# Altium PCB HV Interlock Circuit.PcbDoc
Units mm, origin at the board's own origin, x right, y up, seen from the top; angles counter-clockwise.
Board outline 60 x 60 mm, 2 copper layers (Top Layer, Bottom Layer); 6 components, 12 nets, 31 pads, 0 vias.
Unrouted connection lines stored in the file: 5.
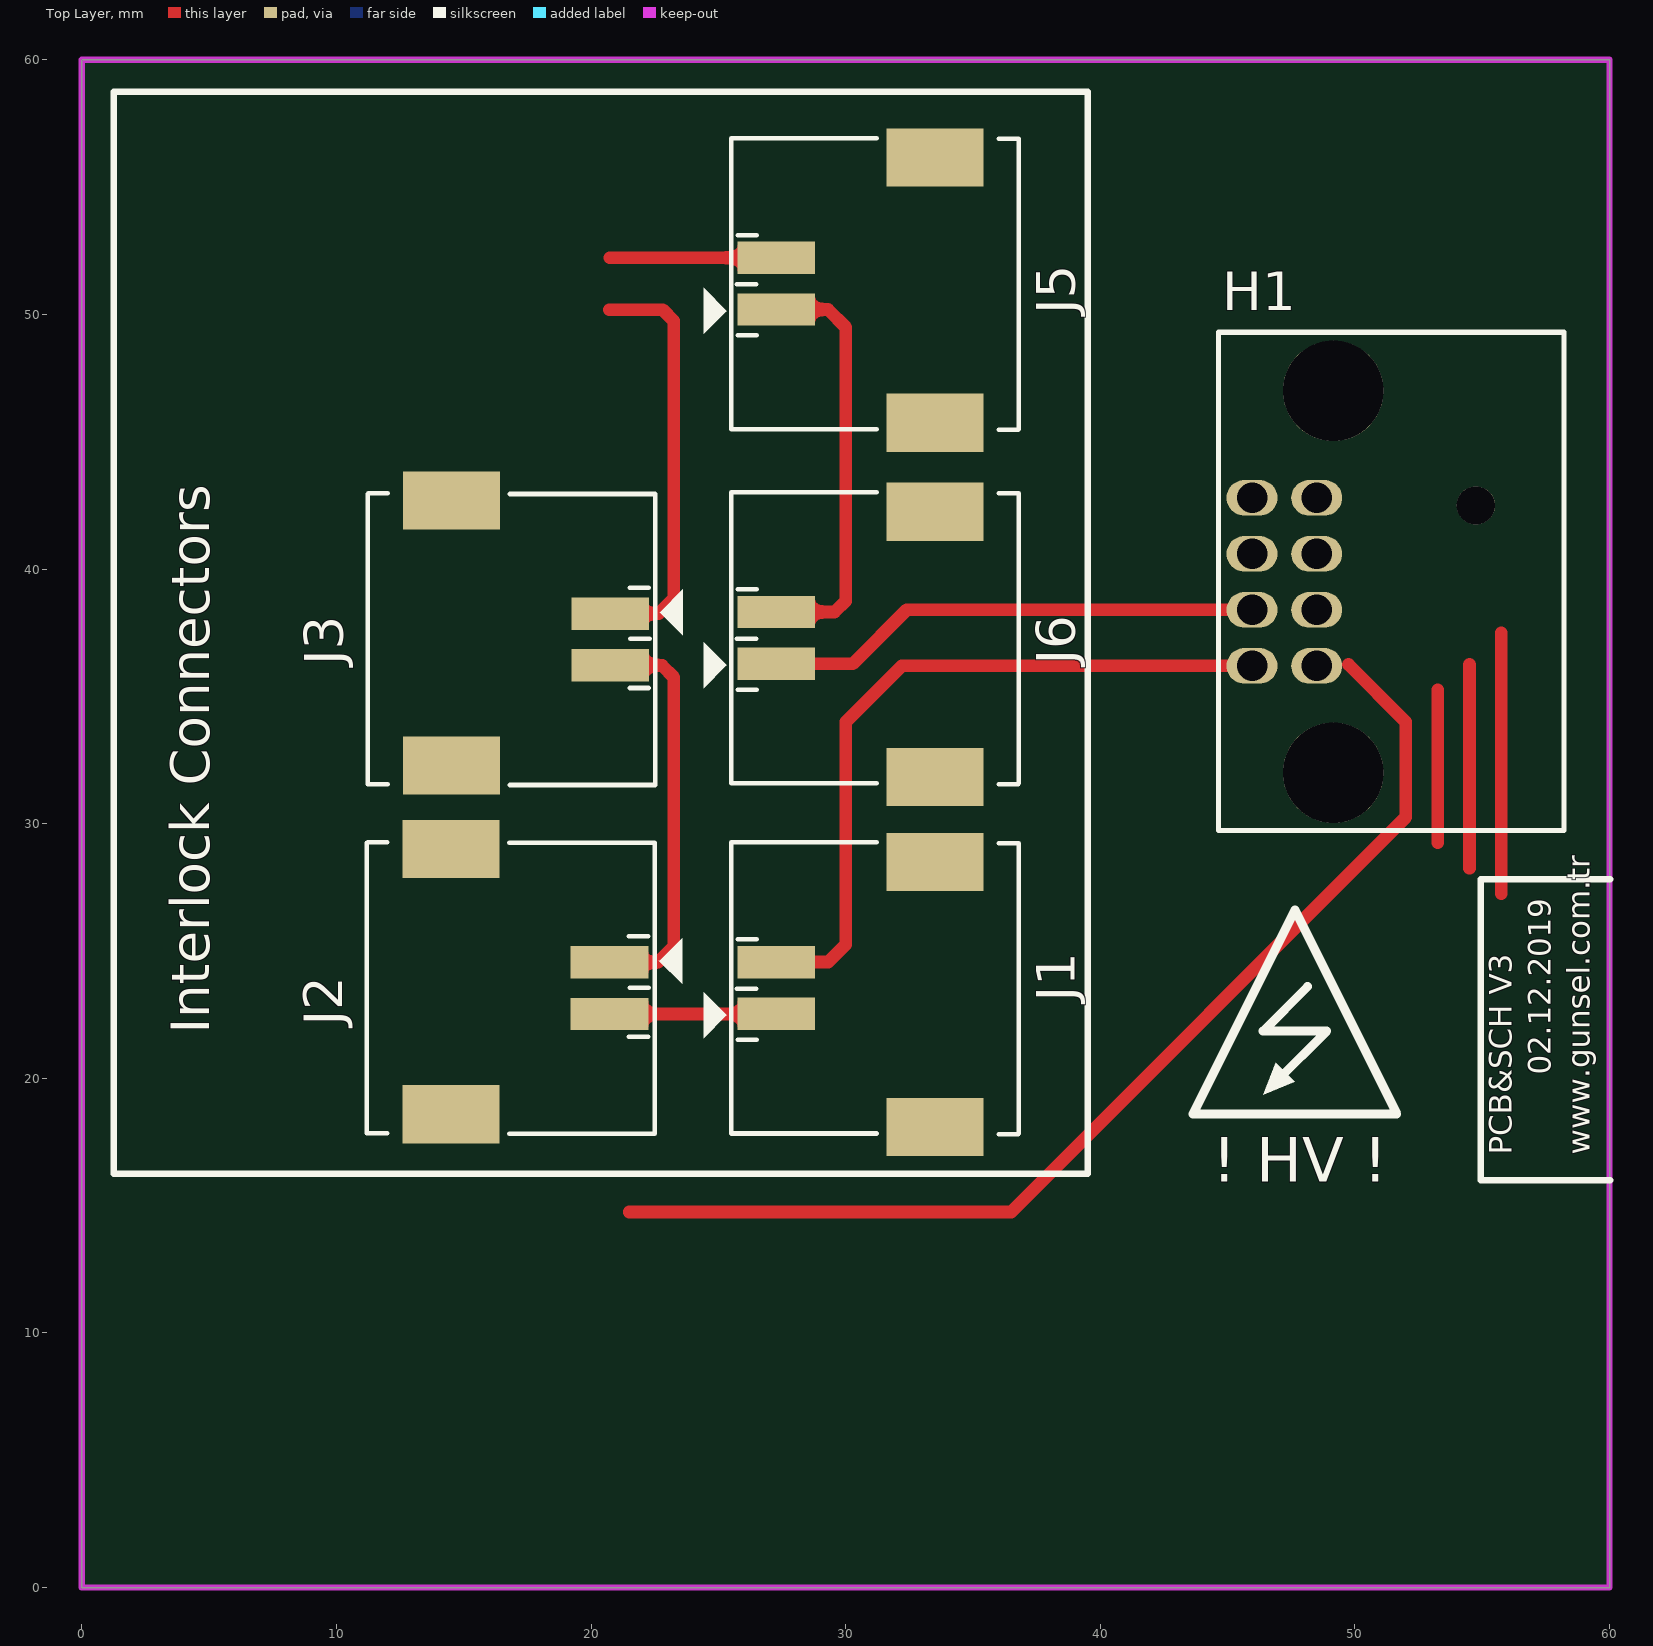
[diagram p0: Top Layer view]
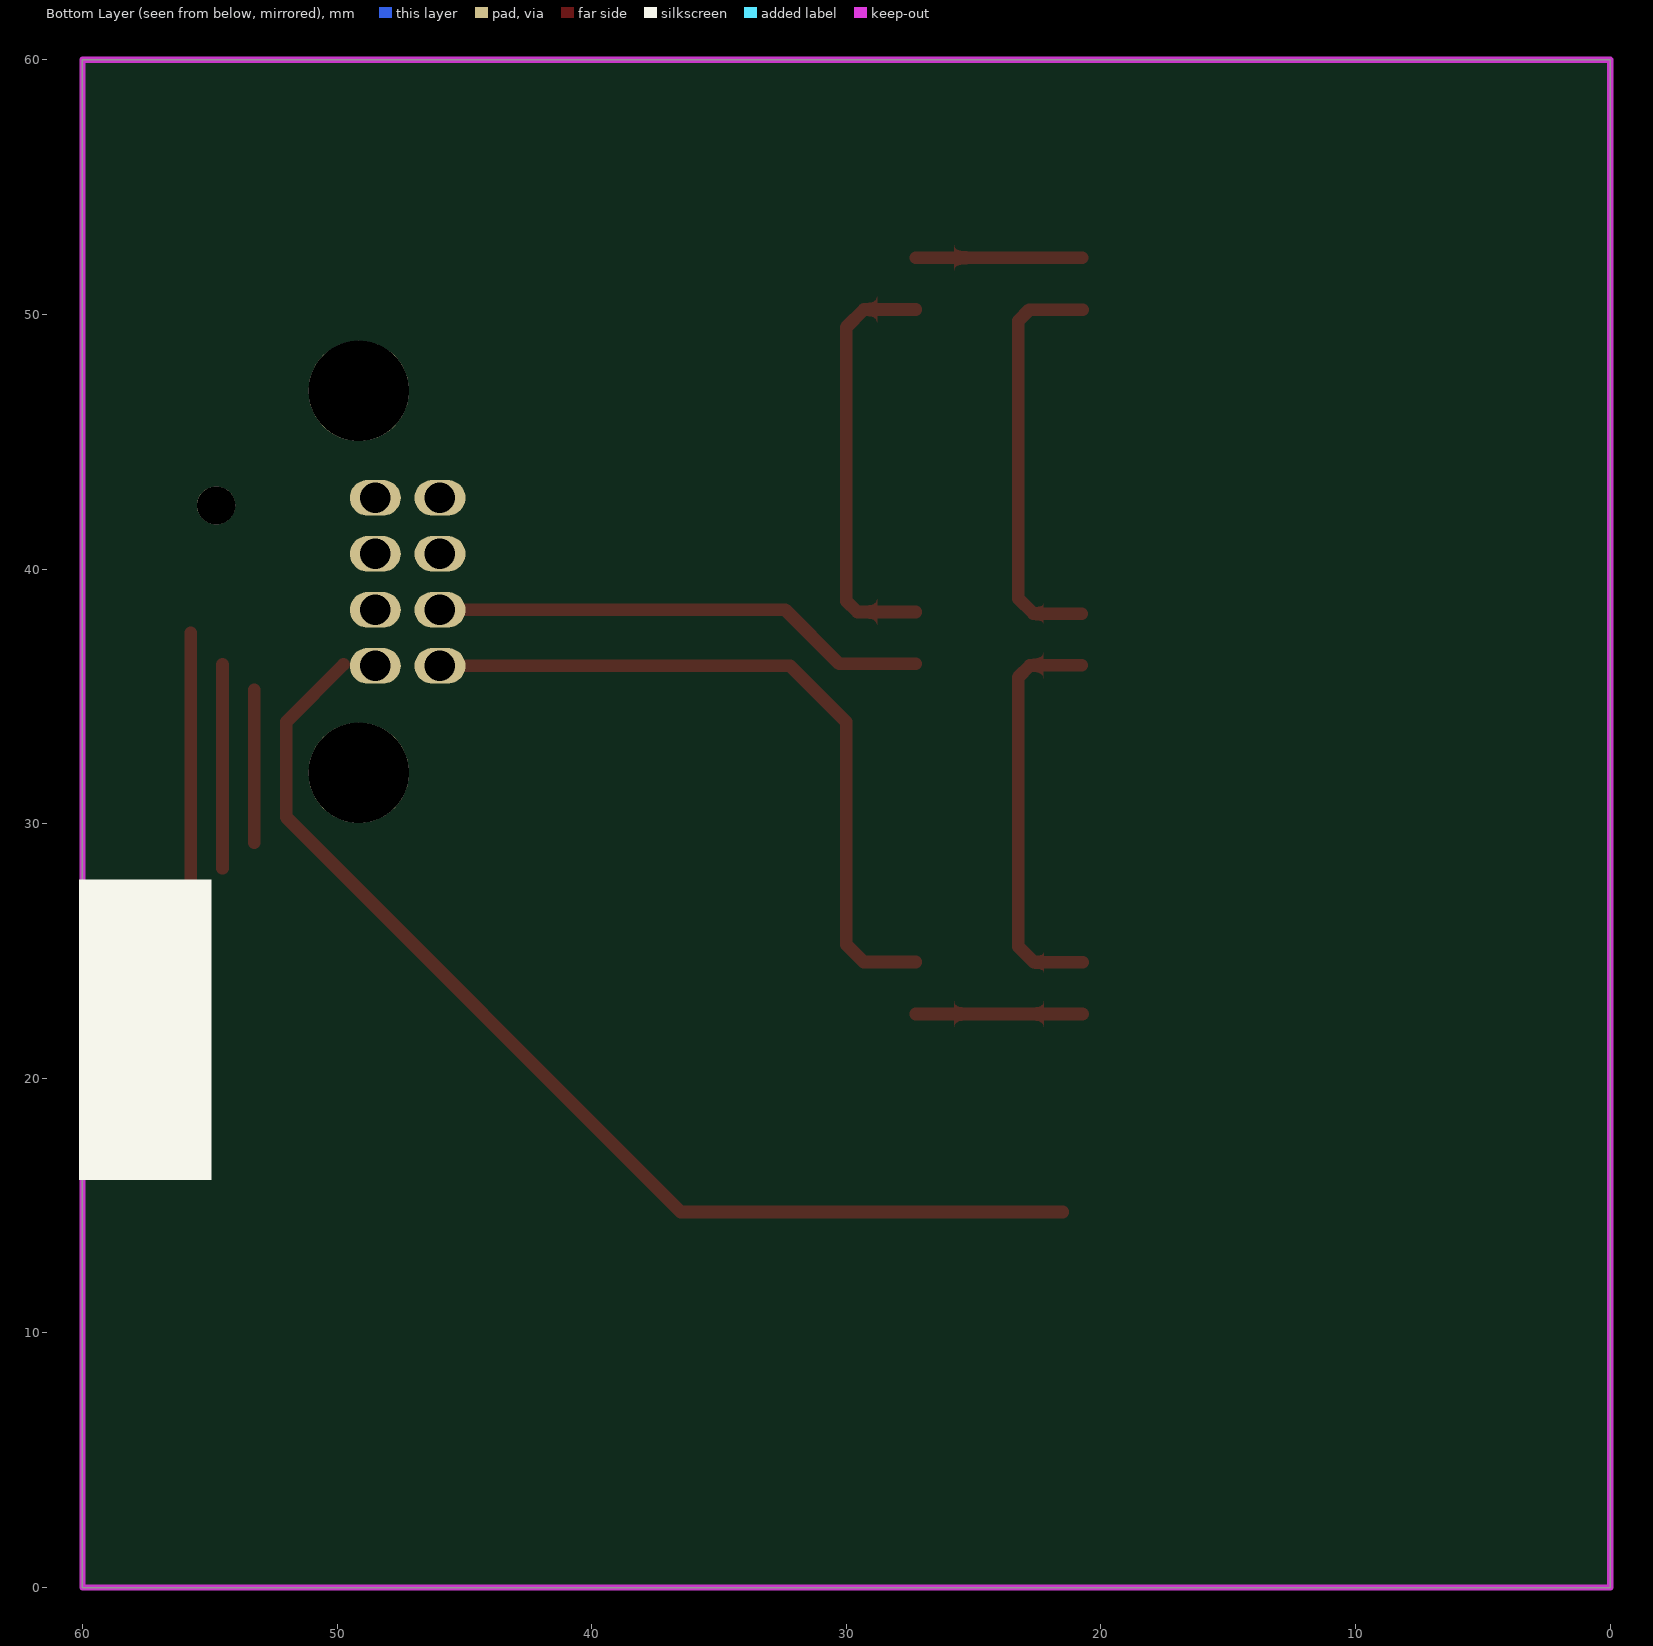
[diagram p1: Bottom Layer view, seen from below]
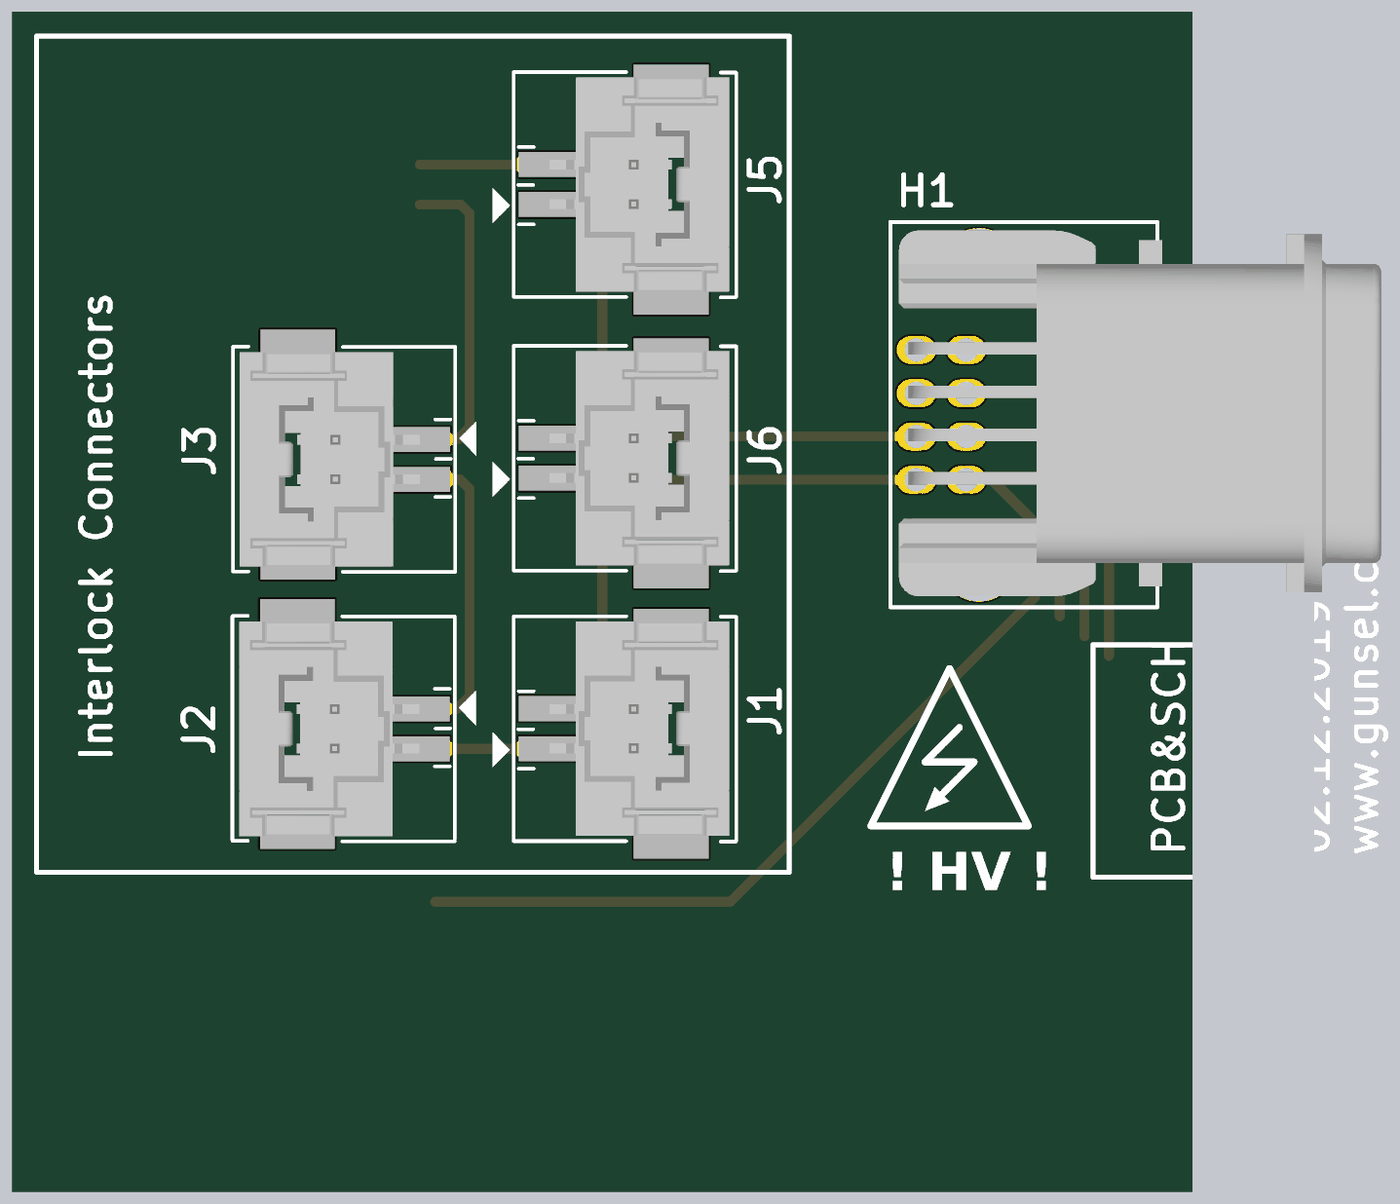
[diagram p2: 3D render of the assembled board from above, using the file's embedded part models]

## Layer stack, top to bottom
Top Solder: solder mask 0.0102, Solder Resist, Dk 3.5
Top Layer: signal copper 0.0356
Dielectric 1: dielectric 0.32, FR-4, Dk 4.8
Bottom Layer: signal copper 0.0356
Bottom Solder: solder mask 0.0102, Solder Resist, Dk 3.5

## Board outline
0,60 0,0 60,0 60,60

## Design rules (kind name [scope] priority, off if disabled: settings)
Clearance [All] p1: gap=0.254 ignorepadtopadclearanceinfootprint=FALSE except(0: Arc-Hole Track-Hole SMDPad-Hole THPad-Hole Via-Hole Fill-Hole Poly-Hole Region-Hole Text-Hole)
PolygonConnect [All] p1: connectstyle=Relief reliefconductorwidth=0.254 reliefentries=4 polygonreliefangle="90 Angle" airgapwidth=0.254
RoutingTopology RoutingTopology_1 [All] p1: topology=Shortest
RoutingTopology [All] p2: topology=Shortest
RoutingVias [All] p1: holewidth=0.711 width=1.27 viastyle="Through Hole" minholewidth=0.711 minwidth=1.27 maxholewidth=0.711 maxwidth=1.27
SolderMaskExpansion [All] p1: expansion=0.102
Width [All] p1: maxlimit=2 minlimit=0.254 preferedwidth=0.5 minimp=50.000000 maximp=50.000000 favimp=50.000000
29 further rules are at their usual default settings.

## Components (designator, comment, footprint, x,y, rotation, side; value= is the part's Value field where it differs from the comment)
H1 "TE-1379684-1" TE-1379684-1 45.96,36.2 r90 top
J1 "560020-0220" 560020-0220 27.277,22.531 r90 top
J2 "560020-0220" 560020-0220 20.723,24.555 r270 top
J3 "560020-0220" 560020-0220 20.75,38.25 r270 top
J5 "560020-0220" 560020-0220 27.277,50.195 r90 top
J6 "560020-0220" 560020-0220 27.277,36.281 r90 top

## Footprints (in the part's own frame and the unit in brackets; to place one, negate y for a bottom-side part, rotate by r counter-clockwise, add the part's x,y. Pads: shape width x height; smd on the part's side, far side on the other; paste and mask are expansions set on the pad)
560020-0220 [mil]
  rect 50x120 smd: 1(0,0) 2(80,0)
  rect 90x150 smd: ""(-175,-245) ""(235,-245)
  silkscreen extent -186,-375 265,112, body extent -175,-361 255,-1, height 311
TE-1379684-1 [mm]
  oval 1.4x2 hole 1.2: 1(6.6,0) 2(4.4,0) 3(2.2,0) 4(0,0) 5(6.6,-2.54) 6(4.4,-2.54) 7(2.2,-2.54) 8(0,-2.54)
  round 3.95 hole 3.95: Hole(-4.2,-3.19) Hole(10.8,-3.19)
  round 1.5 hole 1.5: Hole(6.3,-8.79)
  silkscreen extent -6.48,-12.25 13.1,1.33, body extent -5.92,-23.61 12.68,0.89, height 14.85

## Part data
J1 J2 J3 J5 J6: "CONN HEADER SMD 2POS 2MM", Color=Natural, Manufacturer=Molex, Supplier Part Number 1=WM10862DKR-ND, Connector Type="Male Pin", Contact Material="Copper Alloy", Contact Plating=Tin, Fastening Type=Latch, Gender=Male, Glow Wire Compliant=Non-compliant, Manufacturer Part Number=560020-0220, Mount="Surface Mount", Number of Circuits=2, Number of Contacts=2, Number of Positions=2, Number of Rows=1, Orientation=Vertical, Packaging="Tape and Reel", Pitch=0.079inch, Pricing 1="1=0.78, 10=0.685, 100=0.5912 (USD)", REACH SVHC=Unknown, Stock 1=20760, Supplier 1=Digi-Key, Termination=Solder
H1: ComponentLink1Description="TE-HEADER ASSY,8w .025 SERIES, R.", ComponentLink1URL=https://www.te.com/usa-en/product-1379684-1.html, ComponentLink2Description="Mouser-Automotive Connectors HEADER ASSY 8w .025 SERIES R. ANGLE", ComponentLink2URL=https://eu.mouser.com/ProductDetail/TE-Connectivity/1379684-1?qs=GQ3BsEl46pnfvp5%2F0fNBmw==

## Nets (pads, with @x,y where several pads share a name; then routed paths per layer and width w, separated by ;. In a path a pad name is that pad's centre, name@x,y a point inside that pad or via, vN(x,y) a via of type N, cw(c..) or ccw(c..) an arc to the next point about the centre after c; other vN are vias at no path point)
GND: H1.1 H1.2
NetH1_3: H1.3 J6.1 | length 19.6
  Top Layer w0.5: J6.1 30.281,36.281 32.4,38.4 H1.3
NetH1_4: H1.4 J1.2 | length 28.6
  Top Layer w0.5: J1.2 29.313,24.563 30,25.25 30,34 32.2,36.2 H1.4
NetH1_5: H1.5 | length 10.2
  Top Layer w0.5: 55.75,27.25 55.75,37.5
NetH1_6: H1.6 | length 8
  Top Layer w0.5: 54.5,28.25 54.5,36.25
NetH1_7: H1.7 | length 6
  Top Layer w0.5: 53.25,29.25 53.25,35.25
NetH1_8: H1.8 | length 43.9
  Top Layer w0.5: 21.5,14.75 36.5,14.75 52,30.25 52,34 49.75,36.25
NetJ1_1: J1.1 J2.2 | length 6.6
  Top Layer w0.5: J2.2 27.269,22.523 J1.1
NetJ2_1: J2.1 J3.2 | length 16.1
  Top Layer w0.5: J2.1 22.628,24.555 23.25,25.177 23.25,35.75 22.782,36.218 J3.2
NetJ3_1: J3.1 | length 16.4
  Top Layer w0.5: 20.723,50.187 22.813,50.187 23.25,49.75 23.25,38.845 22.655,38.25 J3.1
NetJ4_1: J5.2 | length 6.5
  Top Layer w0.5: 20.731,52.227 J5.2
NetJ5_1: J5.1 J6.2 | length 16.7
  Top Layer w0.5: J6.2 29.563,38.313 30,38.75 30,49.5 29.305,50.195 J5.1
pads on no net: H1.Hole J1. J2. J3. J5. J6.

## Polygon pours and split planes (outlines as drawn)
no net on Top Layer "Top Layer-No Net" (solid, pour order 18): 75.25,75.5
no net on Top Layer "Top Layer-No Net 1" (solid, pour order 14): 0,59.75

## Keep-outs
Keep-Out Layer:
  the board outline again, w0.254

## Other copper
Top Layer:
  pour cut-out: 36.773,15.75 51.486,30.463 51.486,33.486 51.5,33.5 56.5,33.5 56.5,27.329 45.25,16.079 45.25,15.75
  pour cut-out: 49.75,35.25 51.5,33.5 56.5,33.5 56.5,38 50.75,43.75 50,43.75
  pour cut-out: 31.75,39 44.75,39 44.75,35.75 31.75,35.75
  pour cut-out: 40.75,35.5
  pour cut-out: 44.25,29.5
  pour cut-out: 18.5,20.806 18.5,53.496 30.514,53.505 30.514,51.514 30.514,20.677

## Silkscreen, mask and mechanical layers (free items; w line width, h text height)
Top Overlay:
  region: 46.395,19.355 46.895,20.605 47.645,19.855
  lines w0.254: 60.025,16 54.938,16 54.938,27.811 60.025,27.811 ; 1.25,16.25 1.25,58.75 39.5,58.75 39.5,16.25 1.25,16.25
  lines w0.35: 46.895,19.855 48.895,21.855 46.395,21.855 48.145,23.605 ; 43.645,18.605 47.645,26.605 51.645,18.605 43.645,18.605
  text "Interlock Connectors" at 5,21.75 h1.52 r90
  text "PCB&SCH V3 /         02.12.2019 / www.gunsel.com.tr" at 59.51,17 h1.52 r90
  text "! HV !" at 44.395,15.355 h3
Bottom Overlay:
  region: 60.145,27.811 54.938,27.811 54.938,16 60.145,16